# Altium PCB PCB1.PcbDoc
Units mil, origin at the board's own origin, x right, y up, seen from the top; angles counter-clockwise.
Board outline 595 x 2075 mil, 2 copper layers (Top Layer, Bottom Layer); 20 components, 19 nets, 108 pads, 39 vias.
Unrouted connection lines stored in the file: 1.
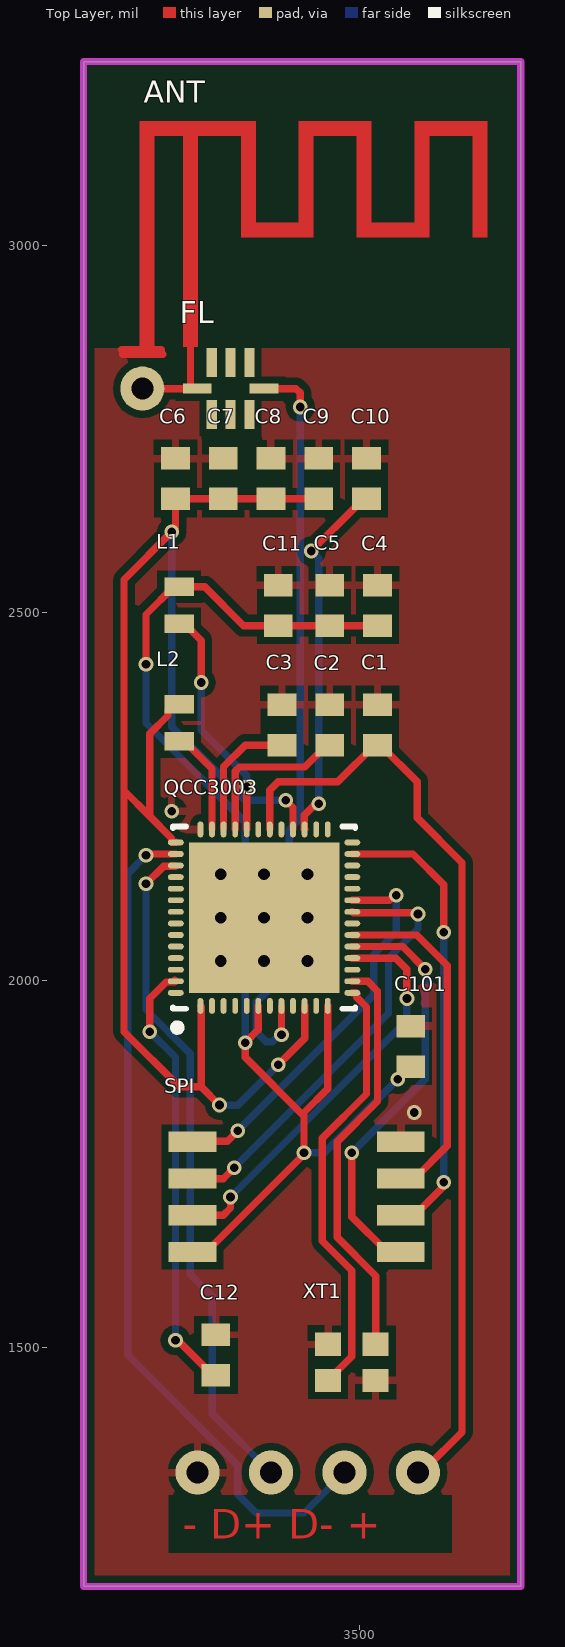
[diagram p0: Top Layer view]
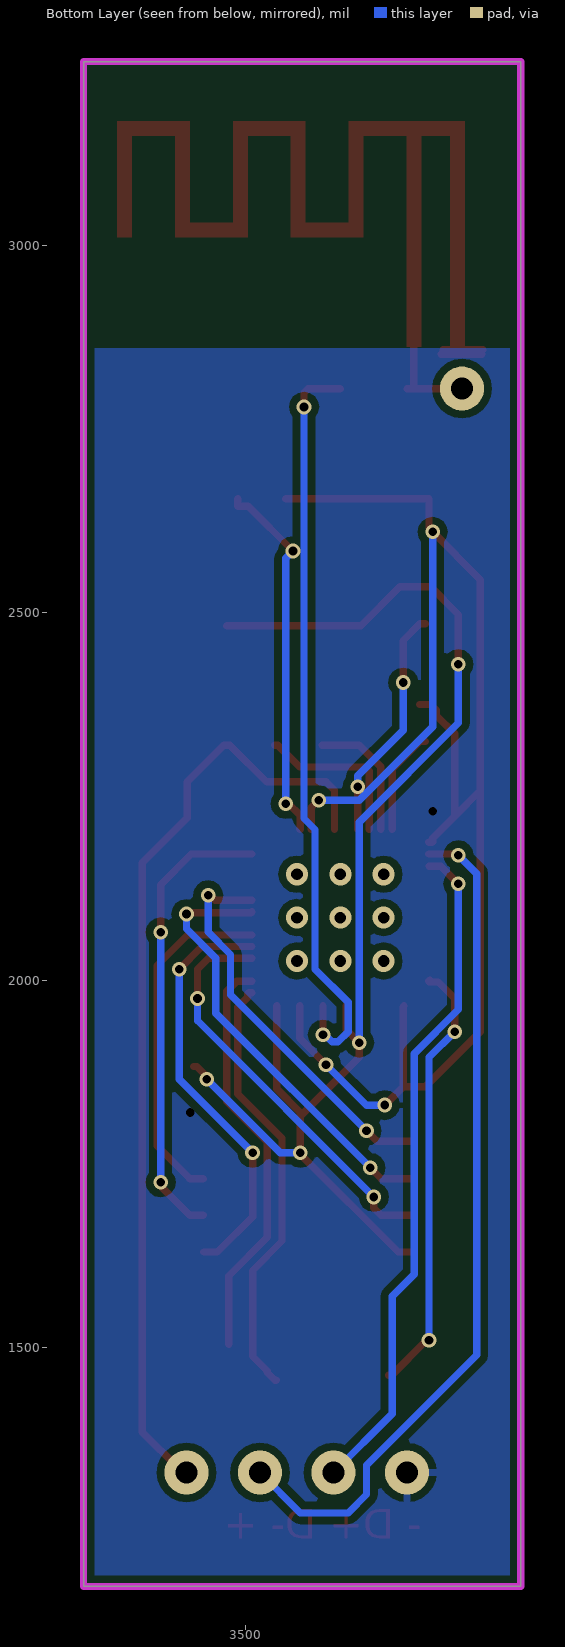
[diagram p1: Bottom Layer view, seen from below]

## Layer stack, top to bottom
Top Solder: solder mask 0.4, Solder Resist, Dk 3.5
Top Layer: signal copper 1.4
Dielectric 1: dielectric 12.6, FR-4, Dk 4.8
Bottom Layer: signal copper 1.4
Bottom Solder: solder mask 0.4, Solder Resist, Dk 3.5

## Board outline
3125,1175 3125,3250 3720,3250 3720,1175

## Design rules (kind name [scope] priority, off if disabled: settings)
Clearance [All] p1 off: gap=10 ignorepadtopadclearanceinfootprint=FALSE except(0: Arc-Hole Track-Hole SMDPad-Hole THPad-Hole Via-Hole Fill-Hole Poly-Hole Region-Hole Text-Hole)
PolygonConnect [All] p1: connectstyle=Relief reliefconductorwidth=10 reliefentries=4 polygonreliefangle="90 Angle" airgapwidth=10
RoutingVias [All] p1: holewidth=11.81 width=20 viastyle="Through Hole" minholewidth=11.81 minwidth=20 maxholewidth=28 maxwidth=50
SolderMaskExpansion [All] p1: expansion=4 istentingtop=FALSE
Width [All] p1: maxlimit=10 minlimit=10 preferedwidth=10
30 further rules are at their usual default settings.

## Classes and differential pairs
component class Sheet2: C1 C2 C3 C4 C5 C6 C7 C8 C9 C10 C11 C12 C101 L2 QCC3003 SPI XT1

## Components (designator, comment, footprint, x,y, rotation, side; value= is the part's Value field where it differs from the comment)
ANT "Comment" ANT 3615,3090 r0 top
C1 "" CAPC1608X90N 3525,2347.44 r90 top
C2 "" CAPC1608X90N 3460,2347.44 r90 top
C3 "" CAPC1608X90N 3395,2347.44 r90 top
C4 "" CAPC1608X90N 3525,2510 r90 top
C5 "" CAPC1608X90N 3460,2510 r90 top
C6 "" CAPC1608X90N 3250,2682.44 r90 top
C7 "" CAPC1608X90N 3315,2682.44 r90 top
C8 "" CAPC1608X90N 3380,2682.44 r90 top
C9 "" CAPC1608X90N 3445,2682.44 r90 top
C10 "" CAPC1608X90N 3510,2682.44 r90 top
C11 "" CAPC1608X90N 3390,2510 r90 top
C12 "" CAPC1608X90N 3305,1490 r90 top
C101 "" CAPC1608X90N 3570,1910 r270 top
FL "2400-2500MHz" WE-LPF_0805 3325,2805 r0 top
L1 "" 0603CS82NXGLW 3255,2510 r180 top
L2 "" 0603CS82NXGLW 3255,2350 r180 top
QCC3003 "QCC3003" QFN40P600X600X60 3370.63,2085.08 r90 top
SPI "" SOIC127P790X216-8N 3415,1705 r180 top
XT1 "" ABM1026000MHZD30T3 3490,1480 r180 top

## Footprints (in the part's own frame and the unit in brackets; to place one, negate y for a bottom-side part, rotate by r counter-clockwise, add the part's x,y. Pads: shape width x height; smd on the part's side, far side on the other; paste and mask are expansions set on the pad)
0603CS82NXGLW [mil]
  rect 40.16x25.2 smd: 1(0,25.2) 2(0,-25.2)
ABM1026000MHZD30T3 [mil]
  rect 35.43x31.5 smd: 1(-32.48,-24.61) 2(32.48,-24.61) 3(32.48,24.61) 4(-32.48,24.61)
ANT [mil]
  Top Layer region: -354.33,59.06 -354.33,-228.35 -334.65,-228.35 -334.65,59.06
  Top Layer region: 39.37,-78.74 59.06,-78.74 59.06,78.74 -39.37,78.74 -39.37,-59.06 -98.43,-59.06 -98.43,78.74 -196.85,78.74 -196.85,-59.06 -255.91,-59.06 -255.91,78.74 -413.39,78.74 -413.39,-228.35 -393.7,-228.35 -393.7,59.06 -275.59,59.06 -275.59,-78.74 -177.17,-78.74 -177.17,59.06 -118.11,59.06 -118.11,-78.74 -19.68,-78.74 -19.68,59.06 39.37,59.06
CAPC1608X90N [mil]
  rect 30.71x38.98 smd: 1(-27.56,0) 2(27.56,0)
QFN40P600X600X60 [mm] "QFN, 52-Leads, Body 6.00x6.00mm, Pitch 0.40mm, Thermal Pad 5.20x5.20mm, IPC Medium Density"
  oval 0.55x0.2 smd: 1(-3.05,2.2) 2(-3.05,1.8) 3(-3.05,1.4) 4(-3.05,1) 5(-3.05,0.6) 6(-3.05,0.2) 7(-3.05,-0.2) 8(-3.05,-0.6) 9(-3.05,-1) 10(-3.05,-1.4) 11(-3.05,-1.8) 12(-3.05,-2.2) 27(3.05,-2.2) 28(3.05,-1.8) 29(3.05,-1.4) 30(3.05,-1) 31(3.05,-0.6) 32(3.05,-0.2) 33(3.05,0.2) 34(3.05,0.6) 35(3.05,1) 36(3.05,1.4) 37(3.05,1.8) 38(3.05,2.2)
  oval 0.2x0.55 smd: 13(-2.6,-3.05) 14(-2.2,-3.05) 15(-1.8,-3.05) 16(-1.4,-3.05) 17(-1,-3.05) 18(-0.6,-3.05) 19(-0.2,-3.05) 20(0.2,-3.05) 21(0.6,-3.05) 22(1,-3.05) 23(1.4,-3.05) 24(1.8,-3.05) 25(2.2,-3.05) 26(2.6,-3.05) 39(2.6,3.05) 40(2.2,3.05) 41(1.8,3.05) 42(1.4,3.05) 43(1,3.05) 44(0.6,3.05) 45(0.2,3.05) 46(-0.2,3.05) 47(-0.6,3.05) 48(-1,3.05) 49(-1.4,3.05) 50(-1.8,3.05) 51(-2.2,3.05) 52(-2.6,3.05)
  rect 5.2x5.2 smd: 53(0,0)
  silkscreen extent -3.92,-3.15 3.15,3.15, body extent -3,-3 3,3, height 0.6
SOIC127P790X216-8N [mm]
  rect 1.65x0.7 smd: 1(-3.6,1.905) 2(-3.6,0.635) 3(-3.6,-0.635) 4(-3.6,-1.905) 5(3.6,-1.905) 6(3.6,-0.635) 7(3.6,0.635) 8(3.6,1.905)
WE-LPF_0805 [mm] "Multilayer Chip Low-Pass Filter, body 2x1.25mm"
  rect 0.35x1 smd: 1(0.65,0.9) 2(0,0.9) 3(-0.65,0.9) 5(-0.65,-0.9) 6(0,-0.9) 7(0.65,-0.9)
  rect 1x0.35 smd: 4(-1.15,0) 8(1.15,0)
  body extent -1,-0.63 1,0.62, height 0.9

## Part data
C1 C2 C3 C4 C5 C6 C7 C8 C9 C10 C11 C12 C101: library part 06031A4R7BAT2A, Manufacturer_Name=AVX, Package=CAPC1608X90N, Arrow_Part_Number=06031A4R7BAT2A, Arrow_Price-Stock=https://www.arrow.com/en/products/06031a4r7bat2a/avx, DeviceSetName=06031A4R7BAT2A, GateName_1=G$1, Height=0.9mm, LibraryName=06031A4R7BAT2A, Manufacturer_Part_Number=06031A4R7BAT2A, SymbolName_1=06031A4R7BAT2A
FL: library part 748125024, "WE-LPF Multilayer Chip Low-Pass Filter, size 0805, 2400-2500MHz", Manufacturer="Wurth Elektronik", Operating Temperature="-40 to +85degC", ComponentLink1Description=Manufacturer, ComponentLink1URL=http://www.we-online.de, ComponentLink2Description=Datasheet, ComponentLink2URL=https://www.we-online.com/catalog/datasheet/748125024.pdf, Frequency Range=2400-2500MHz, Insertion Loss=0.5dB, Manufacturer Part Number=748125024, Mounting Technology=SMT, Packaging="Tape and Reel", Published Date="April 2020", Size=0805, VSWR=1.8
L1 L2: library part 0603CS-22NXJLU, Manufacturer_Name=COILCRAFT, Package=0603CS82NXGLW, DeviceSetName=0603CS-22NXJLU, GateName_1=G$1, Height=1mm, LibraryName=0603CS-22NXJLU, Manufacturer_Part_Number=0603CS-22NXJLU, Mouser_Part_Number=994-0603CS-22NXJLU, Mouser_Price-Stock=http://www.mouser.com/Search/ProductDetail.aspx?qs=zCSbvcPd3pZzI0Qezu9TiA%3d%3d, SymbolName_1=0603CS-22NXJLU
SPI: library part MX25L1606EM2I-12G, Manufacturer_Name=Macronix, Package=SOIC127P790X216-8N, Arrow_Part_Number=MX25L1606EM2I-12G, Arrow_Price-Stock=https://www.arrow.com/en/products/mx25l1606em2i-12g/macronix-international, DeviceSetName=MX25L1606EM2I-12G, GateName_1=G$1, Height=2.16mm, LibraryName=MX25L1606EM2I-12G, Manufacturer_Part_Number=MX25L1606EM2I-12G, SymbolName_1=MX25L1606EM2I-12G
XT1: library part ABM10-26.000MHZ-D30-T3, Manufacturer_Name=ABRACON, Package=ABM1026000MHZD30T3, Arrow_Part_Number=ABM10-26.000MHZ-D30-T3, Arrow_Price-Stock=https://www.arrow.com/en/products/abm10-26.000mhz-d30-t3/abracon, DeviceSetName=ABM10-26.000MHZ-D30-T3, GateName_1=G$1, Height=0.5mm, LibraryName=ABM10-26.000MHZ-D30-T3, Manufacturer_Part_Number=ABM10-26.000MHZ-D30-T3, Mouser_Part_Number=815-ABM10-26-D30T3, Mouser_Price-Stock=https://www.mouser.co.uk/ProductDetail/ABRACON/ABM10-26000MHZ-D30-T3?qs=yJy3i4hRrMjoFDiCOmitYA%3D%3D, SymbolName_1=ABM10-26.000MHZ-D30-T3

## Free pads (board coordinates)
  round 60 hole 30: 3(3580,1330) 4(3480,1330) 5(3380,1330) 6(3280,1330) 7(3205,2805)

## Via types
v1: diameter 20, hole 11.81, Top Layer to Bottom Layer, 28 vias
v2: diameter 30, hole 16, Top Layer to Bottom Layer, 9 vias
v3: diameter 20/10 (per signal layer), hole 11.81, Top Layer to Bottom Layer, 2 vias

## Nets (pads, with @x,y where several pads share a name; then routed paths per layer and width w, separated by ;. In a path a pad name is that pad's centre, name@x,y a point inside that pad or via, vN(x,y) a via of type N, cw(c..) or ccw(c..) an arc to the next point about the centre after c; other vN are vias at no path point)
GND: C1.2 C2.2 C3.2 C4.2 C5.2 C6.2 C7.2 C8.2 C9.2 C10.2 C11.2 C12.2 C101.1 pad.6 QCC3003.33 QCC3003.38 SPI.4 XT1.2 XT1.4
  other v3: 3575,1820 3245,2230
NetC1_1: C1.1 QCC3003.32 | length 1280.9
  Top Layer w10: QCC3003.32 3378.5,2258.5 3390,2270 3470.99,2270 3520.86,2319.88 C1.1 3529.14,2319.88 3579.01,2270 3579.01,2220.99 3640,2160 3640,1385 3590,1335
NetC2_1: C2.1 QCC3003.35 | length 222.5
  Top Layer w10: QCC3003.35 3331.26,2284.14 3337.12,2290 3425.99,2290 3455.86,2319.88 C2.1
NetC3_1: C3.1 QCC3003.36 | length 177
  Top Layer w10: QCC3003.36 3315.51,2290.51 3344.88,2319.88 C3.1
NetC4_1: C4.1 C5.1 C11.1 C101.2 L1.2 QCC3003.6 QCC3003.12 SPI.8 | length 1799.7
  Top Layer w10: v1(3210,2430) 3210,2497.68 3247.52,2535.2 L1.2 3289.8,2535.2 3342.56,2482.44 C11.1 C5.1 C4.1 ; SPI.8 3291.97,1630 3425,1763.03 v1(3425,1765) 3425,1815 ; QCC3003.6 3362.76,1932.76 v1(3345,1915) 3345,1895 3425,1815 ; QCC3003.12 3457.24,1852.24 3425,1820 3425,1815 ; v1(3552.56,1865) 3554.47,1866.91 3554.47,1871.05 3565.86,1882.44 C101.2
  Bottom Layer w10: v1(3210,2430) 3210,2350 3345,2215 v1(3345,1915) ; v1(3425,1765) 3452.56,1765 v1(3552.56,1865)
NetC6_1: C6.1 C7.1 C8.1 C9.1 L2.2 QCC3003.1 QCC3003.10 QCC3003.30 QCC3003.39 | length 2216.9
  Top Layer w10: QCC3003.39 3245.79,2187.44 3244.72,2188.5 3244.72,2193.27 3215,2222.99 ; L2.2@3262.48,2375.2 L2.2 3247.52,2375.2 3239.92,2367.6 3239.92,2360.12 3215,2335.2 3215,2222.99 ; QCC3003.1 3285,1964.02 3285,1855 ; v1(3310,1830) 3285,1855 ; v1(3390,1885) 3425.75,1920.75 QCC3003.10 ; v1(3400,2245) 3410,2235 QCC3003.30 ; C9.1 C8.1 C7.1 C6.1 3250,2615 v1(3245,2610) 3180,2545 3180,2257.99 ; 3180,2257.99 3180,1930 3255,1855 3285,1855 ; 3180,2257.99 3215,2222.99
  Bottom Layer w10: v1(3245,2610) 3245,2345 3345,2245 v1(3400,2245) ; v1(3310,1830) 3335,1830 v1(3390,1885)
NetC10_1: C10.1 QCC3003.29 | length 503.7
  Top Layer w10: QCC3003.29 3425.37,2205.53 3425.37,2224.31 3441.06,2240 v1(3445,2240) ; v1(3435,2584.01) 3495.99,2645 3510,2645 C10.1
  Bottom Layer w10: v1(3435,2584.01) 3445,2574.01 v1(3445,2240)
NetC12_1: C12.1 QCC3003.51 | length 601.6
  Top Layer w10: v1(3215,1930) 3215,1975 3237.4,1997.4 3249.49,1997.4 QCC3003.51 QCC3003.51@3249.02,2000 ; v1(3250,1510) 3253.3,1510 3300.86,1462.44 C12.1
  Bottom Layer w10: v1(3215,1930) 3250,1895 v1(3250,1510)
NetL1_1: L1.1 QCC3003.34 | length 322.1
  Top Layer w10: L1.1 3262.48,2484.8 3285,2462.28 v1(3285,2405) ; QCC3003.34 v1(3347.01,2262.99)
  Bottom Layer w10: v1(3285,2405) 3285,2340 3347.01,2277.99 v1(3347.01,2262.99)
NetL2_1: L2.1 QCC3003.37 | length 142.6
  Top Layer w10: L2.1 3262.48,2324.8 3299.76,2287.52 QCC3003.37
NetQCC3003_13: QCC3003.13 XT1.3 | length 594.1
  Top Layer w10: XT1.3 3459.49,1455.39 3470.24,1466.14 3470.24,1468.11 3490,1487.87 3490,1605 3450,1645 3450,1785 3510,1845 3510,1963.43 3496.54,1976.89 3496.54,1981.65 3495.47,1982.72 QCC3003.13
NetQCC3003_14: QCC3003.14 XT1.1 | length 564.8
  Top Layer w10: QCC3003.14 3511.54,1998.46 3525,1985 3525,1835 3470,1780 3470,1650 3522.48,1597.52 XT1.1
NetQCC3003_16: QCC3003.16 SPI.7 | length 560.8
  Top Layer w10: SPI.7 3315,1680 3325,1690 v1(3325,1705) ; QCC3003.16 3550.04,2029.96 3565,2015 v1(3565,1975)
  Bottom Layer w10: v1(3325,1705) 3565,1945 v1(3565,1975)
NetQCC3003_17: QCC3003.17 SPI.1 | length 577
  Top Layer w10: v1(3490,1765) 3490,1678.03 3538.03,1630 SPI.1 ; QCC3003.17 3559.29,2045.71 v1(3590,2015)
  Bottom Layer w10: v1(3490,1765) 3590,1865 v1(3590,2015)
NetQCC3003_18: QCC3003.18 SPI.3 | length 473.6
  Top Layer w10: QCC3003.18 3578.54,2061.46 3620,2020 3620,1774.57 3575.43,1730 SPI.3
NetQCC3003_20: QCC3003.20 SPI.6 | length 602.2
  Top Layer w10: SPI.6 3315.33,1730 v1(3330,1744.67) ; QCC3003.20 3491.77,2091.89 3578.11,2091.89 v1(3580,2090)
  Bottom Layer w10: v1(3330,1744.67) 3330,1745 3540,1955 3540,2030 3580,2070 v1(3580,2090)
NetQCC3003_21: QCC3003.21 SPI.5 | length 540.4
  Top Layer w10: SPI.5 3274.02,1780.75 3320.75,1780.75 v1(3335,1795) ; QCC3003.21 3540.99,2108.7 3547.81,2115.51 v1(3550.51,2115.51)
  Bottom Layer w10: v1(3335,1795) 3520,1980 3520,2035 3550.51,2065.51 v1(3550.51,2115.51)
NetQCC3003_25: QCC3003.25 SPI.2 | length 626.7
  Top Layer w10: QCC3003.25 3573.31,2171.69 3615,2130 v1(3615,2065) ; SPI.2 3575.43,1680 3613.09,1717.66 3613.09,1723.09 v1(3615,1725)
  Bottom Layer w10: v1(3615,1725) v1(3615,2065)
NetQCC3003_31: QCC3003.31
pads on no net: FL.1 FL.2 FL.3 FL.4 FL.5 FL.6 FL.7 FL.8 QCC3003.2 QCC3003.3 QCC3003.4 QCC3003.5 QCC3003.7 QCC3003.8 QCC3003.9 QCC3003.11 QCC3003.15 QCC3003.19 QCC3003.22 QCC3003.23 QCC3003.24 QCC3003.26 QCC3003.27 QCC3003.28 QCC3003.40 QCC3003.41 QCC3003.42 QCC3003.43 QCC3003.44 QCC3003.45 QCC3003.46 QCC3003.47 QCC3003.48 QCC3003.49 QCC3003.50 QCC3003.52 QCC3003.53
copper on no net: | length 3437
  Top Layer w10: 3176.9,2857.75 3197.71,2857.75 3191.86,2851.9 3233.1,2851.9 3178.06,2851.9 ; 3192.19,2857.75 3230.72,2857.75 3225.2,2852.23 3197.71,2852.23 ; 3205,2805 3250,2805 3279.72,2805 ; v1(3210,2131.02) 3233.98,2155 3249.61,2155 ; v1(3210,2170) 3211.69,2171.69 3250.55,2171.69 ; 3270.51,2810.65 3270.51,2861.65 ; 3370.28,2805 3414.14,2805 3420,2799.14 v1(3420,2780) ; v1(3394.25,1925.75) 3394.25,1934.25 3394.25,1965
  Bottom Layer w10: v1(3210,2131.02) 3210,2127.15 3210,1960 3270,1900 3270,1600 3300,1570 3300,1410 3380,1330 ; v1(3210,2170) 3185,2145 3185,1825 3185,1490 3335,1340 3335,1300 3360,1275 3425,1275 3480,1330 ; v1(3394.25,1925.75) 3391.55,1925.75 3382.04,1916.24 3373.76,1916.24 3360,1930 3360,1970 3405,2015 3405,2205 3420,2220 v1(3420,2780)
  other v2: 3311.57,2026.02 3370.63,2026.02 3429.68,2026.02 3311.57,2085.08 3370.63,2085.08 3429.68,2085.08 3311.57,2144.13 3370.63,2144.13 3429.68,2144.13

## Polygon pours and split planes (outlines as drawn)
GND on Bottom Layer "GND_L02_P003" (solid, remove dead copper, pour order 3): 3125,2860 3720,2860 3720,1175 3125,1175
GND on Top Layer "GND_L01_P006" (solid, remove dead copper, pour order 6): 3125,1175 3720,1175 3720,2855 3725,2860 3125,2860

## Keep-outs
Keep-Out Layer:
  the board outline again, w10

## Other copper
Top Layer:
  text "- D+ D- +" at 3260,1240 h40